# Altium PCB S52多功能板.PcbDoc (part 3 of 5)
Units mm, origin at the board's own origin, x right, y up, seen from the top; angles counter-clockwise.
Board outline 152.4 x 101.6 mm, 2 copper layers (Top Layer, Bottom Layer); 136 components, 143 nets, 561 pads, 46 vias.
Unrouted connection lines stored in the file: 1.
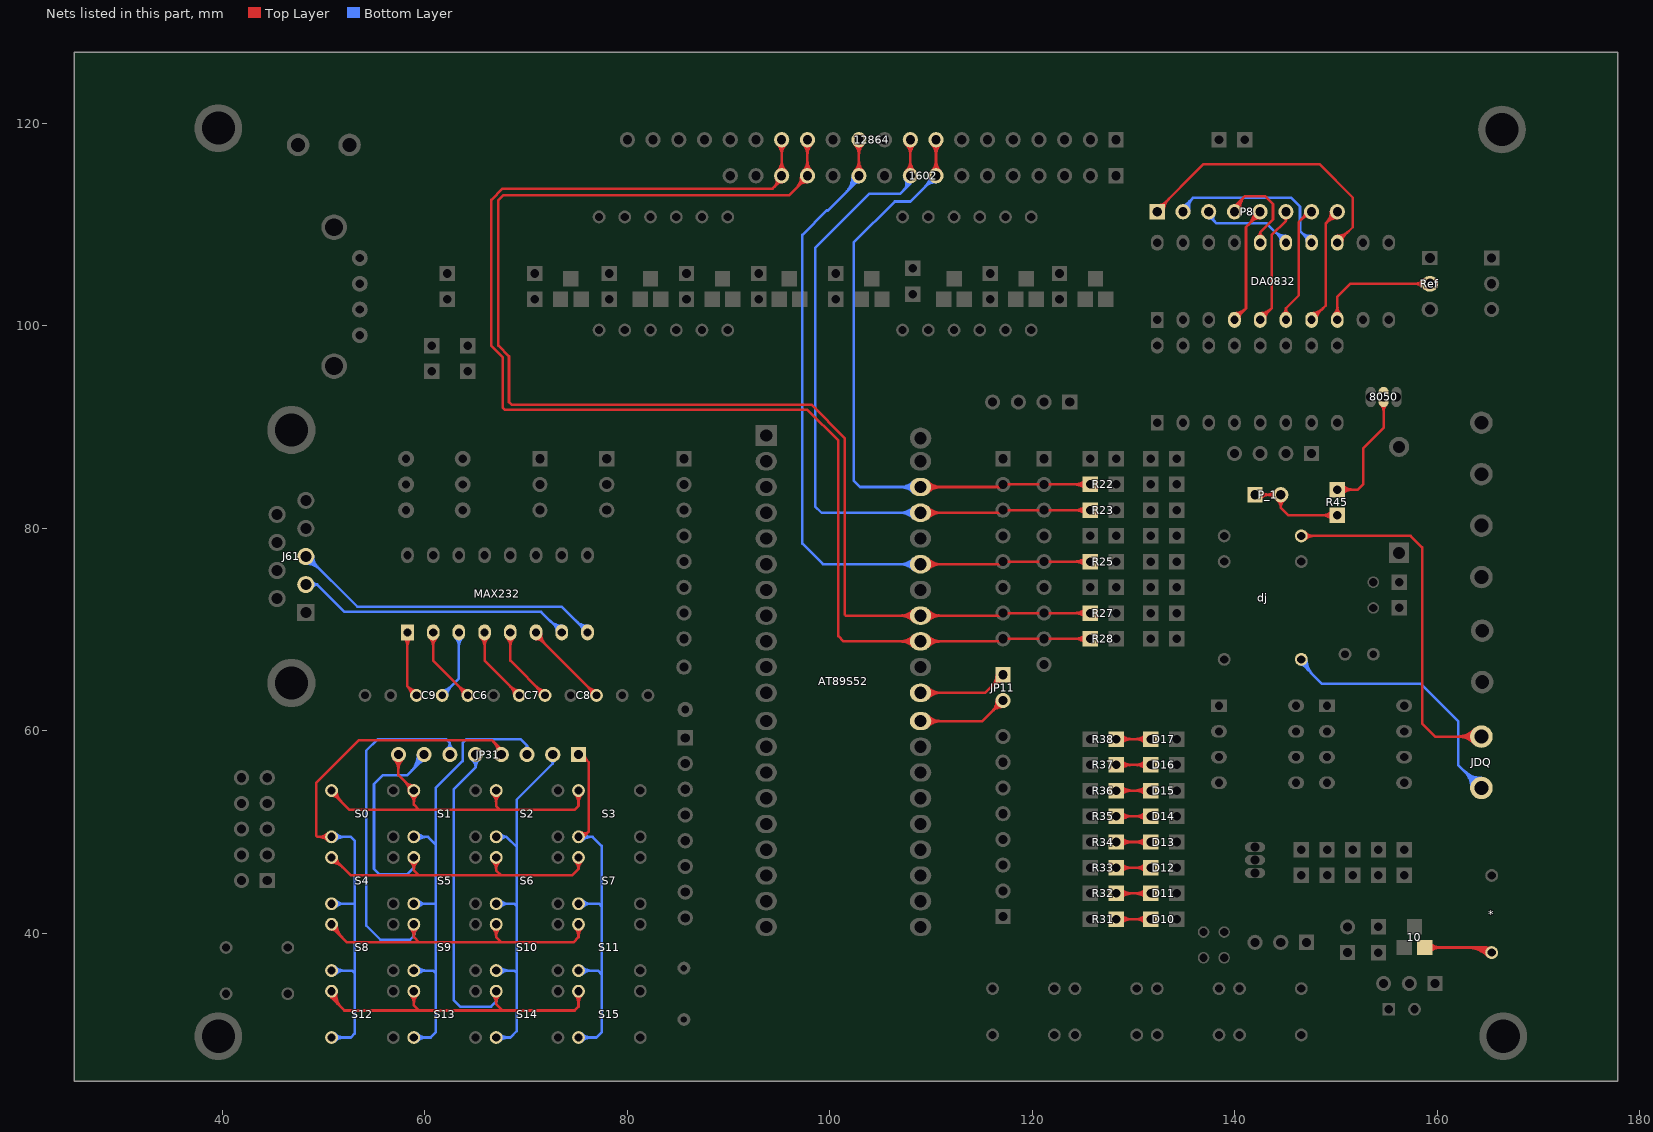
[diagram p3: the nets of this part, all layers, seen from the top]

## Via types
v1: diameter 1.27, hole 0.711, Top Layer to Bottom Layer, 46 vias

## Nets (pads, with @x,y where several pads share a name; then routed paths per layer and width w, separated by ;. In a path a pad name is that pad's centre, name@x,y a point inside that pad or via, vN(x,y) a via of type N, cw(c..) or ccw(c..) an arc to the next point about the centre after c; other vN are vias at no path point) (continued)
Net*_1: 10.E *.1 | length 17.7
  Top Layer w0.254: 10.E@158.75,38.608 164.846,38.608 ; 10.E@159.019,38.339 cw(c159.67,37.688) 159.67,38.608 cw(c159.67,39.528) 10.E@159.019,38.877 ; 10.E@159.199,38.159 cw(c160.283,37.075) 160.283,38.608 cw(c160.283,40.141) 10.E@159.199,39.057 ; 162.901,38.608 cw(c162.901,35.647) *.1@164.995,37.741 ; 163.514,38.608 cw(c163.514,36.26) *.1@165.174,37.92 ; 164.128,38.608 cw(c164.128,36.874) *.1@165.354,38.1 164.846,38.608 ; 164.741,38.608 cw(c164.741,37.487) *.1@165.534,38.28 ; *.1@164.896,38.319 ccw(c164.666,38.428) 164.846,38.608 ; *.1@165.135,38.558 cw(c165.026,38.788) 164.846,38.608
NetAT89S52_29: AT89S52.29 JP11.2 | length 17.6
  Top Layer w0.254: AT89S52.29@108.966,60.96 115.062,60.96 JP11.2@117.094,62.992 ; AT89S52.29@109.485,60.591 cw(c110.375,59.701) 110.375,60.96 cw(c110.375,62.219) AT89S52.29@109.485,61.329 ; AT89S52.29@109.664,60.412 cw(c110.988,59.088) 110.988,60.96 cw(c110.988,62.832) AT89S52.29@109.664,61.508 ; JP11.2@116.471,62.992 cw(c114.967,62.992) 116.03,61.928 cw(c117.094,60.865) JP11.2@117.094,62.369 ; JP11.2@116.725,62.992 cw(c115.834,62.992) 116.464,62.362 cw(c117.094,61.732) JP11.2@117.094,62.623
NetAT89S52_30: AT89S52.30 JP11.1 | length 17.5
  Top Layer w0.254: AT89S52.30@108.962,63.753 115.315,63.753 JP11.1@117.094,65.532 ; AT89S52.30@109.481,63.384 cw(c110.371,62.494) 110.371,63.753 cw(c110.371,65.012) AT89S52.30@109.481,64.122 ; AT89S52.30@109.66,63.205 cw(c110.984,61.881) 110.984,63.753 cw(c110.984,65.625) AT89S52.30@109.66,64.301 ; JP11.1@116.471,65.532 cw(c114.967,65.532) 116.03,64.468 cw(c117.094,63.405) JP11.1@117.094,64.909 ; JP11.1@116.725,65.532 cw(c115.834,65.532) 116.464,64.902 cw(c117.094,64.272) JP11.1@117.094,65.163
NetC6_1: C6.1 MAX232.2 | length 11.5
  Top Layer w0.254: MAX232.2@60.482,69.205 cw(c59.632,68.355) 60.834,68.355 cw(c62.036,68.355) MAX232.2@61.186,69.205 ; MAX232.2@60.834,69.719 60.834,66.928 C6.1@64.262,63.5 ; C6.1@63.754,63.5 ccw(c62.528,63.5) 63.395,64.367 ccw(c64.262,65.234) C6.1@64.262,64.008
NetC7_1: C7.1 MAX232.4 | length 11.5
  Top Layer w0.254: MAX232.4@65.562,69.205 cw(c64.712,68.355) 65.914,68.355 cw(c67.116,68.355) MAX232.4@66.266,69.205 ; MAX232.4@65.914,69.719 65.914,66.928 C7.1@69.342,63.5 ; C7.1@68.834,63.5 ccw(c67.608,63.5) 68.475,64.367 ccw(c69.342,65.234) C7.1@69.342,64.008
NetC7_2: C7.2 MAX232.5 | length 11.5
  Top Layer w0.254: MAX232.5@68.102,69.205 cw(c67.252,68.355) 68.454,68.355 cw(c69.656,68.355) MAX232.5@68.806,69.205 ; MAX232.5@68.454,69.719 68.454,66.928 C7.2@71.882,63.5 ; C7.2@71.374,63.5 ccw(c70.148,63.5) 71.015,64.367 ccw(c71.882,65.234) C7.2@71.882,64.008
NetC8_2: C8.2 MAX232.6 | length 13.1
  Top Layer w0.254: MAX232.6@70.994,69.059 cw(c70.994,68.071) 71.693,68.769 ; MAX232.6@70.994,69.719 70.994,69.468 C8.2@76.962,63.5 ; MAX232.6@71.238,69.557 ccw(c72.041,69.557) 71.473,68.989 ; MAX232.6@71.492,69.557 ccw(c72.909,69.557) 71.907,68.555 ; C8.2@76.454,63.5 ccw(c75.228,63.5) 76.095,64.367 ccw(c76.962,65.234) C8.2@76.962,64.008
NetC9_1: C9.1 MAX232.1 | length 10.4
  Top Layer w0.254: MAX232.1@57.942,69.205 cw(c57.092,68.355) 58.294,68.355 cw(c59.496,68.355) MAX232.1@58.646,69.205 ; MAX232.1@58.294,69.719 58.294,64.388 C9.1@59.182,63.5 ; C9.1@58.674,63.5 ccw(c57.448,63.5) 58.315,64.367 ccw(c59.182,65.234) C9.1@59.182,64.008
NetC9_2: C9.2 MAX232.3 | length 10.7
  Bottom Layer w0.254: C9.2@61.722,63.5 63.374,65.152 MAX232.3@63.374,69.719 ; C9.2@61.722,64.008 ccw(c61.722,65.234) 62.589,64.367 ccw(c63.456,63.5) C9.2@62.23,63.5 ; MAX232.3@63.022,69.205 cw(c62.172,68.355) 63.374,68.355 cw(c64.576,68.355) MAX232.3@63.726,69.205
NetD10_2: D10.2 R31.2 | length 11.3
  Top Layer w0.254: R31.2@128.27,41.402 D10.2@131.699,41.402 D10.2@131.572,41.275 ; R31.2@128.539,41.133 cw(c129.19,40.482) 129.19,41.402 cw(c129.19,42.322) R31.2@128.539,41.671 ; R31.2@128.719,40.953 cw(c129.803,39.869) 129.803,41.402 cw(c129.803,42.935) R31.2@128.719,41.851 ; D10.2@131.25,40.953 ccw(c130.166,39.869) 130.166,41.402 ccw(c130.166,42.935) D10.2@131.25,41.851 ; D10.2@131.43,41.133 ccw(c130.779,40.482) 130.779,41.402 ccw(c130.779,42.322) D10.2@131.43,41.671
NetD11_2: D11.2 R32.2 | length 11.3
  Top Layer w0.254: R32.2@128.27,43.942 D11.2@131.699,43.942 D11.2@131.572,43.815 ; R32.2@128.539,43.673 cw(c129.19,43.022) 129.19,43.942 cw(c129.19,44.862) R32.2@128.539,44.211 ; R32.2@128.719,43.493 cw(c129.803,42.409) 129.803,43.942 cw(c129.803,45.475) R32.2@128.719,44.391 ; D11.2@131.25,43.493 ccw(c130.166,42.409) 130.166,43.942 ccw(c130.166,45.475) D11.2@131.25,44.391 ; D11.2@131.43,43.673 ccw(c130.779,43.022) 130.779,43.942 ccw(c130.779,44.862) D11.2@131.43,44.211
NetD12_2: D12.2 R33.2 | length 11.3
  Top Layer w0.254: R33.2@128.27,46.482 D12.2@131.699,46.482 D12.2@131.572,46.355 ; R33.2@128.539,46.213 cw(c129.19,45.562) 129.19,46.482 cw(c129.19,47.402) R33.2@128.539,46.751 ; R33.2@128.719,46.033 cw(c129.803,44.949) 129.803,46.482 cw(c129.803,48.015) R33.2@128.719,46.931 ; D12.2@131.25,46.033 ccw(c130.166,44.949) 130.166,46.482 ccw(c130.166,48.015) D12.2@131.25,46.931 ; D12.2@131.43,46.213 ccw(c130.779,45.562) 130.779,46.482 ccw(c130.779,47.402) D12.2@131.43,46.751
NetD13_2: D13.2 R34.2 | length 11.3
  Top Layer w0.254: R34.2@128.27,49.022 D13.2@131.699,49.022 D13.2@131.572,48.895 ; R34.2@128.539,48.753 cw(c129.19,48.102) 129.19,49.022 cw(c129.19,49.942) R34.2@128.539,49.291 ; R34.2@128.719,48.573 cw(c129.803,47.489) 129.803,49.022 cw(c129.803,50.555) R34.2@128.719,49.471 ; D13.2@131.25,48.573 ccw(c130.166,47.489) 130.166,49.022 ccw(c130.166,50.555) D13.2@131.25,49.471 ; D13.2@131.43,48.753 ccw(c130.779,48.102) 130.779,49.022 ccw(c130.779,49.942) D13.2@131.43,49.291
NetD14_2: D14.2 R35.2 | length 11.1
  Top Layer w0.254: R35.2@128.27,51.562 D14.2@131.699,51.562 ; R35.2@128.539,51.293 cw(c129.19,50.642) 129.19,51.562 cw(c129.19,52.482) R35.2@128.539,51.831 ; R35.2@128.719,51.113 cw(c129.803,50.029) 129.803,51.562 cw(c129.803,53.095) R35.2@128.719,52.011 ; D14.2@131.25,51.113 ccw(c130.166,50.029) 130.166,51.562 ccw(c130.166,53.095) D14.2@131.25,52.011 ; D14.2@131.43,51.293 ccw(c130.779,50.642) 130.779,51.562 ccw(c130.779,52.482) D14.2@131.43,51.831
NetD15_2: D15.2 R36.2 | length 11.3
  Top Layer w0.254: R36.2@128.27,54.102 D15.2@131.699,54.102 D15.2@131.572,53.975 ; R36.2@128.539,53.833 cw(c129.19,53.182) 129.19,54.102 cw(c129.19,55.022) R36.2@128.539,54.371 ; R36.2@128.719,53.653 cw(c129.803,52.569) 129.803,54.102 cw(c129.803,55.635) R36.2@128.719,54.551 ; D15.2@131.25,53.653 ccw(c130.166,52.569) 130.166,54.102 ccw(c130.166,55.635) D15.2@131.25,54.551 ; D15.2@131.43,53.833 ccw(c130.779,53.182) 130.779,54.102 ccw(c130.779,55.022) D15.2@131.43,54.371
NetD16_2: D16.2 R37.2 | length 11.1
  Top Layer w0.254: R37.2@128.27,56.642 D16.2@131.699,56.642 ; R37.2@128.539,56.373 cw(c129.19,55.722) 129.19,56.642 cw(c129.19,57.562) R37.2@128.539,56.911 ; R37.2@128.719,56.193 cw(c129.803,55.109) 129.803,56.642 cw(c129.803,58.175) R37.2@128.719,57.091 ; D16.2@131.25,56.193 ccw(c130.166,55.109) 130.166,56.642 ccw(c130.166,58.175) D16.2@131.25,57.091 ; D16.2@131.43,56.373 ccw(c130.779,55.722) 130.779,56.642 ccw(c130.779,57.562) D16.2@131.43,56.911
NetD17_2: D17.2 R38.2 | length 11.3
  Top Layer w0.254: R38.2@128.27,59.182 D17.2@131.699,59.182 D17.2@131.572,59.055 ; R38.2@128.539,58.913 cw(c129.19,58.262) 129.19,59.182 cw(c129.19,60.102) R38.2@128.539,59.451 ; R38.2@128.719,58.733 cw(c129.803,57.649) 129.803,59.182 cw(c129.803,60.715) R38.2@128.719,59.631 ; D17.2@131.25,58.733 ccw(c130.166,57.649) 130.166,59.182 ccw(c130.166,60.715) D17.2@131.25,59.631 ; D17.2@131.43,58.913 ccw(c130.779,58.262) 130.779,59.182 ccw(c130.779,60.102) D17.2@131.43,59.451
NetDA0832_4: DA0832.4 P8.5 | length 17.7
  Top Layer w0.254: DA0832.4@139.955,100.58 141.097,101.722 141.097,109.728 142.494,111.125 P8.5@142.494,111.252 ; DA0832.4@139.955,100.987 ccw(c139.955,101.968) 140.649,101.274 ; DA0832.4@139.955,101.241 ccw(c139.955,102.835) 141.082,101.708 ; DA0832.4@140.453,100.743 cw(c141.263,100.743) 140.69,101.316 ; 141.341,109.972 ccw(c140.06,111.252) P8.5@141.871,111.252 ; 141.647,110.278 cw(c142.494,109.432) P8.5@142.494,110.629 ; 141.774,110.405 ccw(c140.928,111.252) P8.5@142.125,111.252
NetDA0832_5: DA0832.5 P8.6 | length 15.4
  Top Layer w0.254: DA0832.5@142.495,100.58 143.637,101.722 143.637,108.966 145.034,110.363 ; DA0832.5@142.495,100.987 ccw(c142.495,101.968) 143.189,101.274 ; DA0832.5@142.495,101.241 ccw(c142.495,102.835) 143.622,101.708 ; DA0832.5@142.993,100.743 cw(c143.803,100.743) 143.23,101.316 ; P8.6@144.78,111.252 P8.6@145.034,111.252 145.034,110.363 ; P8.6@144.821,110.666 cw(c144.711,110.363) 145.034,110.363 ; P8.6@145.247,110.666 ccw(c145.357,110.363) 145.034,110.363
NetDA0832_6: DA0832.6 P8.7 | length 15
  Top Layer w0.254: DA0832.6@144.74,101.144 ccw(c144.309,101.728) 145.035,101.728 ; DA0832.6@145.035,100.58 145.035,101.728 ; DA0832.6@145.33,101.144 cw(c145.761,101.728) 145.035,101.728 ; 146.579,110.511 cw(c147.483,109.607) P8.7@147.554,110.884 ; 146.69,110.622 ccw(c146.06,111.252) P8.7@146.951,111.252 ; P8.7@147.574,111.252 147.32,111.252 146.304,110.236 146.304,102.997 145.035,101.728
NetDA0832_7: DA0832.7 P8.8 | length 18.1
  Top Layer w0.254: DA0832.7@147.575,100.58 148.971,101.976 148.971,110.109 P8.8@150.114,111.252 ; DA0832.7@147.575,100.987 ccw(c147.575,101.968) 148.269,101.274 ; DA0832.7@147.575,101.241 ccw(c147.575,102.835) 148.702,101.708 ; DA0832.7@148.073,100.743 cw(c148.883,100.743) 148.31,101.316 ; P8.8@149.491,111.252 cw(c147.987,111.252) 149.05,110.188 cw(c150.114,109.125) P8.8@150.114,110.629 ; P8.8@149.745,111.252 cw(c148.854,111.252) 149.484,110.622 cw(c150.114,109.992) P8.8@150.114,110.883
NetDA0832_8: DA0832.8 Ref.3 | length 17.7
  Top Layer w0.254: DA0832.8@149.763,101.095 ccw(c148.913,101.945) 150.115,101.945 ccw(c151.317,101.945) DA0832.8@150.467,101.095 ; DA0832.8@150.115,100.58 150.115,102.871 151.384,104.14 Ref.3@159.258,104.14 ; Ref.3@158.745,103.691 ccw(c157.661,102.607) 157.661,104.14 ccw(c157.661,105.673) Ref.3@158.745,104.589 ; Ref.3@158.925,103.871 ccw(c158.275,103.22) 158.275,104.14 ccw(c158.275,105.06) Ref.3@158.925,104.409
NetDA0832_13: DA0832.13 P8.1 | length 33.7
  Top Layer w0.254: P8.1@132.334,111.252 132.334,111.379 136.906,115.951 148.336,115.951 151.638,112.649 151.638,109.723 DA0832.13@150.115,108.2 DA0832.13@150.114,108.201 ; P8.1@132.334,111.875 ccw(c132.334,113.072) 133.181,112.226 ; P8.1@132.703,111.252 cw(c133.9,111.252) 133.054,112.099 ; P8.1@132.957,111.252 cw(c134.768,111.252) 133.487,112.532 ; DA0832.13@150.115,108.607 ccw(c150.115,109.588) 150.809,108.894 ; DA0832.13@150.115,108.861 ccw(c150.115,110.455) 151.242,109.328 ; DA0832.13@150.613,108.363 cw(c151.423,108.363) 150.85,108.936
NetDA0832_14: DA0832.14 P8.2 | length 22.9
  Top Layer w0.254: DA0832.14@147.574,108.201 DA0832.14@147.575,108.2
  Bottom Layer w0.254: P8.2@134.874,111.252 134.874,111.633 135.89,112.649 ; P8.2@134.874,111.875 ccw(c134.874,112.459) 135.287,112.046 ; P8.2@134.987,111.272 cw(c135.755,111.411) 135.203,111.962 ; P8.2@135.237,111.317 cw(c136.336,111.516) 135.547,112.306 ; P8.2@135.487,111.363 cw(c136.918,111.621) 135.89,112.649 ; 146.512,109.263 ccw(c147.488,110.239) DA0832.14@147.552,108.86 ; 146.84,108.935 cw(c146.267,108.363) DA0832.14@147.077,108.363 ; 146.919,108.856 ccw(c147.524,109.461) DA0832.14@147.564,108.606 ; DA0832.14@147.575,108.2 146.431,109.344 146.431,111.76 145.542,112.649 135.89,112.649
NetDA0832_15: DA0832.15 P8.3 | length 13.6
  Top Layer w0.254: DA0832.15@145.034,108.201 DA0832.15@145.158,108.077
  Bottom Layer w0.254: P8.3@137.414,110.629 cw(c137.414,110.045) 137.827,110.458 ; P8.3@137.414,111.252 137.414,110.871 138.176,110.109 143.126,110.109 DA0832.15@145.035,108.2 ; P8.3@137.719,111.044 ccw(c138.063,110.81) 137.769,110.516 ; P8.3@137.929,110.901 ccw(c138.321,110.635) 137.985,110.3 ; 143.908,109.328 ccw(c145.035,110.455) DA0832.15@145.035,108.861 ; 144.3,108.935 cw(c143.727,108.363) DA0832.15@144.537,108.363 ; 144.341,108.894 ccw(c145.035,109.588) DA0832.15@145.035,108.607
NetDA0832_16: DA0832.16 P8.4 | length 14.1
  Top Layer w0.254: P8.4@139.954,111.252 139.954,111.76 140.97,112.776 ; P8.4@140.066,111.277 cw(c140.96,111.472) 140.313,112.119 ; P8.4@140.314,111.331 cw(c141.499,111.59) 140.642,112.448 ; P8.4@140.563,111.385 cw(c142.038,111.708) 140.97,112.776 ; DA0832.16@142.248,108.795 ccw(c142.004,109.221) 142.495,109.221 ; DA0832.16@142.494,108.201 DA0832.16@142.495,108.2 142.495,109.221 ; DA0832.16@142.742,108.795 cw(c142.986,109.221) 142.495,109.221 ; 140.97,112.776 143.002,112.776 143.764,112.014 143.764,110.49 142.495,109.221
Netdj_2: dj.2 JDQ.1 | length 46.4
  Top Layer w0.254: dj.2@146.558,79.248 157.353,79.248 158.496,78.105 158.496,60.706 159.766,59.436 JDQ.1@164.338,59.436 ; dj.2@146.917,78.889 cw(c147.784,78.022) 147.784,79.248 cw(c147.784,80.474) dj.2@146.917,79.607 ; JDQ.1@163.642,58.74 ccw(c161.96,57.058) 161.96,59.436 ccw(c161.96,61.814) JDQ.1@163.642,60.132 ; JDQ.1@163.821,58.919 ccw(c162.573,57.671) 162.573,59.436 ccw(c162.573,61.201) JDQ.1@163.821,59.953 ; JDQ.1@164.001,59.099 ccw(c163.186,58.284) 163.186,59.436 ccw(c163.186,60.588) JDQ.1@164.001,59.773
Netdj_4: dj.4 JDQ.2 | length 38
  Bottom Layer w0.254: dj.4@146.558,66.548 cw(c146.558,66.241) 146.775,66.458 ; dj.4@146.812,67.056 ccw(c148.345,67.056) 147.261,65.972 ; 146.827,66.406 cw(c147.478,67.056) dj.4@146.558,67.056 146.558,66.675 148.59,64.643 158.369,64.643 162.052,60.96 162.052,56.642 JDQ.2@164.338,54.356 ; dj.4@147.066,67.056 ccw(c149.212,67.056) 147.695,65.538 ; JDQ.2@163.353,54.356 ccw(c160.975,54.356) 162.657,56.037 ccw(c164.338,57.719) JDQ.2@164.338,55.341 ; JDQ.2@163.607,54.356 ccw(c161.842,54.356) 163.09,55.604 ccw(c164.338,56.852) JDQ.2@164.338,55.087 ; JDQ.2@163.861,54.356 ccw(c162.709,54.356) 163.524,55.17 ccw(c164.338,55.985) JDQ.2@164.338,54.833
NetJ61_2: J61.2 MAX232.7 | length 31.1
  Bottom Layer w0.254: J61.2@48.258,74.446 49.379,74.446 ; J61.2@48.91,74.146 cw(c49.379,73.93) 49.379,74.446 ; J61.2@48.91,74.746 ccw(c49.379,74.962) 49.379,74.446 ; 72.407,70.847 ccw(c73.534,71.974) MAX232.7@73.534,70.38 ; 72.799,70.455 cw(c72.226,69.882) MAX232.7@73.036,69.882 ; 72.84,70.413 ccw(c73.534,71.107) MAX232.7@73.534,70.126 ; MAX232.7@73.534,69.719 71.498,71.755 52.07,71.755 49.379,74.446
NetJ61_3: J61.3 MAX232.8 | length 38.1
  Bottom Layer w0.254: J61.3@48.258,76.498 cw(c48.258,74.453) 49.704,75.899 ; J61.3@48.258,76.752 cw(c48.258,75.32) 49.27,76.333 ; J61.3@48.258,77.216 48.387,77.216 53.34,72.263 73.53,72.263 MAX232.8@76.074,69.719 ; J61.3@48.722,77.216 ccw(c49.531,77.216) 48.959,76.644 ; J61.3@48.976,77.216 ccw(c50.398,77.216) 49.393,76.21 ; 74.947,70.847 ccw(c76.074,71.974) MAX232.8@76.074,70.38 ; 75.339,70.455 cw(c74.766,69.882) MAX232.8@75.576,69.882 ; 75.38,70.413 ccw(c76.074,71.107) MAX232.8@76.074,70.126
NetJP7_18: 
NetJP31_1: JP31.1 S3.2 S7.2 S11.2 S15.2 | length 48.5
  Top Layer w0.254: S3.2@75.184,49.53 75.692,49.53 76.2,50.038 ; JP31.1@75.184,57.658 75.438,57.658 76.2,56.896 76.2,50.038 ; JP31.1@75.269,57.299 cw(c75.451,56.536) 76.005,57.091 ; S3.2@75.321,49.744 ccw(c75.605,50.187) 75.977,49.815 ; S3.2@75.458,49.958 ccw(c75.779,50.459) 76.2,50.038 ; JP31.1@75.807,57.658 ccw(c76.698,57.658) 76.068,57.028
  Bottom Layer w0.254: S15.2@75.184,29.718 76.962,29.718 77.47,30.226 77.47,48.641 76.581,49.53 S3.2@75.184,49.53 ; S11.2@75.184,36.322 77.089,36.322 77.47,35.941 ; S7.2@75.184,42.926 77.216,42.926 77.47,42.672 ; S15.2@75.543,29.359 cw(c76.41,28.492) 76.41,29.718 cw(c76.41,30.944) S15.2@75.543,30.077 ; S11.2@75.543,35.963 cw(c76.41,35.096) 76.41,36.322 cw(c76.41,37.548) S11.2@75.543,36.681 ; S7.2@75.543,42.567 cw(c76.41,41.7) 76.41,42.926 cw(c76.41,44.152) S7.2@75.543,43.285 ; S3.2@75.543,49.171 cw(c76.41,48.304) 76.41,49.53 cw(c76.41,50.756) S3.2@75.543,49.889
NetJP31_2: JP31.2 S2.2 S6.2 S10.2 S14.2 | length 45.8
  Bottom Layer w0.254: S14.2@67.056,29.718 68.453,29.718 69.088,30.353 69.088,53.213 72.644,56.769 ; S10.2@67.056,36.322 68.834,36.322 69.088,36.068 ; S6.2@67.056,42.926 68.834,42.926 69.088,42.672 ; S2.2@67.056,49.53 68.072,49.53 ; S14.2@67.415,29.359 cw(c68.282,28.492) 68.282,29.718 cw(c68.282,30.944) S14.2@67.415,30.077 ; S10.2@67.415,35.963 cw(c68.282,35.096) 68.282,36.322 cw(c68.282,37.548) S10.2@67.415,36.681 ; S6.2@67.415,42.567 cw(c68.282,41.7) 68.282,42.926 cw(c68.282,44.152) S6.2@67.415,43.285 ; S2.2@67.462,49.225 cw(c68.072,48.768) 68.072,49.53 ; S2.2@67.462,49.835 ccw(c68.072,50.292) 68.072,49.53 ; 69.088,48.514 68.072,49.53 ; JP31.2@72.431,57.072 cw(c72.321,56.769) 72.644,56.769 ; JP31.2@72.644,57.658 72.644,56.769 ; JP31.2@72.857,57.072 ccw(c72.967,56.769) 72.644,56.769
NetJP31_3: JP31.3 S1.2 S5.2 S9.2 S13.2 | length 55
  Bottom Layer w0.254: S13.2@58.928,29.718 60.579,29.718 61.087,30.226 61.087,54.356 63.754,57.023 63.754,58.801 64.135,59.182 69.469,59.182 70.104,58.547 ; S9.2@58.928,36.322 60.833,36.322 61.087,36.068 ; S5.2@58.928,42.926 60.96,42.926 ; S1.2@58.928,49.53 60.325,49.53 61.087,48.768 ; S13.2@59.287,29.359 cw(c60.154,28.492) 60.154,29.718 cw(c60.154,30.944) S13.2@59.287,30.077 ; S9.2@59.287,35.963 cw(c60.154,35.096) 60.154,36.322 cw(c60.154,37.548) S9.2@59.287,36.681 ; S5.2@59.287,42.567 cw(c60.154,41.7) 60.154,42.926 cw(c60.154,44.152) S5.2@59.287,43.285 ; S1.2@59.287,49.171 cw(c60.154,48.304) 60.154,49.53 cw(c60.154,50.756) S1.2@59.287,49.889 ; JP31.3@69.891,58.244 ccw(c69.781,58.547) 70.104,58.547 ; JP31.3@70.104,57.658 70.104,58.547 ; JP31.3@70.317,58.244 cw(c70.427,58.547) 70.104,58.547
NetJP31_4: JP31.4 S0.2 S4.2 S8.2 S12.2 | length 68.2
  Top Layer w0.254: S0.2@50.441,49.171 ccw(c49.574,48.304) 49.574,49.53 ccw(c49.574,50.756) S0.2@50.441,49.889 ; S0.2@50.8,49.53 49.403,49.53 49.276,49.657 49.276,54.864 53.467,59.055 66.675,59.055 67.564,58.166 JP31.4@67.564,57.658 ; 66.782,58.948 cw(c65.744,57.91) JP31.4@67.198,57.709 ; 67.144,58.586 cw(c66.379,57.822) JP31.4@67.45,57.674
  Bottom Layer w0.254: S12.2@50.8,29.718 52.705,29.718 53.086,30.099 53.086,49.149 52.705,49.53 S0.2@50.8,49.53 ; S8.2@50.8,36.322 52.832,36.322 53.086,36.068 ; S4.2@50.8,42.926 52.959,42.926 ; S12.2@51.159,29.359 cw(c52.026,28.492) 52.026,29.718 cw(c52.026,30.944) S12.2@51.159,30.077 ; S8.2@51.159,35.963 cw(c52.026,35.096) 52.026,36.322 cw(c52.026,37.548) S8.2@51.159,36.681 ; S4.2@51.159,42.567 cw(c52.026,41.7) 52.026,42.926 cw(c52.026,44.152) S4.2@51.159,43.285 ; S0.2@51.159,49.171 cw(c52.026,48.304) 52.026,49.53 cw(c52.026,50.756) S0.2@51.159,49.889
NetJP31_5: JP31.5 S12.1 S13.1 S14.1 S15.1 | length 76.6
  Top Layer w0.254: S12.1@51.049,34.241 ccw(c52.36,33.984) 51.415,33.04 ; 51.078,33.377 cw(c51.796,34.095) S12.1@50.8,34.29 50.8,33.655 52.07,32.385 74.803,32.385 75.184,32.766 S15.1@75.184,34.29 ; S12.1@51.298,34.192 ccw(c52.923,33.873) 51.752,32.703 ; S13.1@58.569,33.931 cw(c57.702,33.064) 58.928,33.064 cw(c60.154,33.064) S13.1@59.287,33.931 ; S13.1@58.928,34.29 58.928,32.893 59.436,32.385 ; S14.1@66.697,33.931 cw(c65.83,33.064) 67.056,33.064 cw(c68.282,33.064) S14.1@67.415,33.931 ; S14.1@67.056,34.29 67.056,33.02 67.691,32.385 ; S15.1@74.825,33.931 cw(c73.958,33.064) 75.184,33.064 cw(c76.41,33.064) S15.1@75.543,33.931
  Bottom Layer w0.254: JP31.5@64.643,57.165 cw(c64.041,56.388) 65.024,56.388 ; JP31.5@64.77,57.658 JP31.5@65.024,57.658 65.024,56.388 ; JP31.5@64.798,57.366 cw(c64.442,56.906) 65.024,56.906 cw(c65.606,56.906) JP31.5@65.25,57.366 ; JP31.5@65.405,57.165 ccw(c66.007,56.388) 65.024,56.388 ; S14.1@66.751,33.884 cw(c66.294,33.274) 67.056,33.274 ; S14.1@67.056,34.29 67.056,33.274 ; S14.1@67.361,33.884 ccw(c67.818,33.274) 67.056,33.274 ; 65.024,56.388 62.865,54.229 62.865,33.401 63.5,32.766 66.548,32.766 67.056,33.274
NetJP31_6: JP31.6 S8.1 S9.1 S10.1 S11.1 | length 76.6
  Top Layer w0.254: S8.1@50.8,40.386 cw(c50.8,39.773) 51.234,40.206 ; S8.1@50.8,40.894 50.8,40.64 52.324,39.116 74.676,39.116 75.184,39.624 S11.1@75.184,40.894 ; S8.1@51.054,40.894 ccw(c52.28,40.894) 51.413,40.027 ; S8.1@51.308,40.894 ccw(c53.148,40.894) 51.847,39.593 ; S9.1@58.569,40.535 cw(c57.702,39.668) 58.928,39.668 cw(c60.154,39.668) S9.1@59.287,40.535 ; S9.1@58.928,40.894 58.928,39.624 59.436,39.116 ; S10.1@66.697,40.535 cw(c65.83,39.668) 67.056,39.668 cw(c68.282,39.668) S10.1@67.415,40.535 ; S10.1@67.056,40.894 67.056,39.624 67.564,39.116 ; S11.1@74.825,40.535 cw(c73.958,39.668) 75.184,39.668 cw(c76.41,39.668) S11.1@75.543,40.535
  Bottom Layer w0.254: S9.1@58.588,40.517 cw(c57.896,39.751) 58.928,39.751 ; S9.1@58.928,40.894 58.928,39.751 ; S9.1@59.268,40.517 ccw(c59.96,39.751) 58.928,39.751 ; JP31.6@62.146,58.182 ccw(c61.747,58.801) 62.484,58.801 ; JP31.6@62.357,57.658 JP31.6@62.484,57.658 62.484,58.801 ; JP31.6@62.822,58.182 cw(c63.221,58.801) 62.484,58.801 ; 58.928,39.751 58.547,39.37 55.626,39.37 54.229,40.767 54.229,58.039 55.372,59.182 62.103,59.182 62.484,58.801
NetJP31_7: JP31.7 S4.1 S5.1 S6.1 S7.1 | length 65.1
  Top Layer w0.254: S4.1@50.8,46.99 cw(c50.8,45.457) 51.884,46.541 ; S4.1@50.8,47.244 cw(c50.8,46.324) 51.45,46.975 ; S4.1@50.8,47.498 50.927,47.498 52.705,45.72 74.549,45.72 75.184,46.355 ; S4.1@51.308,47.498 ccw(c52.228,47.498) 51.577,46.848 ; S5.1@58.569,47.139 cw(c57.702,46.272) 58.928,46.272 cw(c60.154,46.272) S5.1@59.287,47.139 ; S5.1@58.928,47.498 58.928,46.228 59.436,45.72 ; S6.1@66.697,47.139 cw(c65.83,46.272) 67.056,46.272 cw(c68.282,46.272) S6.1@67.415,47.139 ; S6.1@67.056,47.498 67.056,46.228 67.564,45.72 ; S7.1@74.844,47.121 cw(c74.152,46.355) 75.184,46.355 ; S7.1@75.184,47.498 75.184,46.355 ; S7.1@75.524,47.121 ccw(c76.216,46.355) 75.184,46.355
  Bottom Layer w0.254: 58.611,55.944 ccw(c56.897,57.658) JP31.7@59.321,57.658 ; S5.1@58.623,47.092 cw(c58.166,46.482) 58.928,46.482 ; S5.1@58.928,47.498 58.928,46.482 ; 59.045,56.378 ccw(c57.764,57.658) JP31.7@59.575,57.658 ; S5.1@59.233,47.092 ccw(c59.69,46.482) 58.928,46.482 ; 59.478,56.811 ccw(c58.632,57.658) JP31.7@59.829,57.658 ; 59.531,56.864 cw(c59.944,56.451) JP31.7@59.944,57.035 ; JP31.7@59.944,57.658 59.944,57.277 58.293,55.626 55.88,55.626 54.991,54.737 54.991,46.355 55.499,45.847 58.293,45.847 58.928,46.482
NetJP31_8: JP31.8 S0.1 S1.1 S2.1 S3.1 | length 49.4
  Top Layer w0.254: S0.1@50.8,53.594 cw(c50.8,52.674) 51.45,53.325 ; S0.1@50.8,54.102 50.8,53.975 52.578,52.197 74.803,52.197 75.184,52.578 S3.1@75.184,54.102 ; S0.1@51.054,54.102 ccw(c51.974,54.102) 51.323,53.452 ; S0.1@51.308,54.102 ccw(c52.841,54.102) 51.757,53.018 ; JP31.8@56.963,57.217 cw(c55.9,56.154) 57.404,56.154 cw(c58.908,56.154) JP31.8@57.845,57.217 ; JP31.8@57.143,57.397 cw(c56.513,56.767) 57.404,56.767 cw(c58.295,56.767) JP31.8@57.665,57.397 ; JP31.8@57.404,57.658 57.404,55.626 S1.1@58.928,54.102 58.928,52.705 59.436,52.197 ; S1.1@58.42,54.102 ccw(c57.194,54.102) 58.061,54.969 ccw(c58.928,55.836) S1.1@58.928,54.61 ; S1.1@58.569,53.743 cw(c57.702,52.876) 58.928,52.876 cw(c60.154,52.876) S1.1@59.287,53.743 ; S2.1@66.697,53.743 cw(c65.83,52.876) 67.056,52.876 cw(c68.282,52.876) S2.1@67.415,53.743 ; S2.1@67.056,54.102 67.056,52.578 67.437,52.197 ; S3.1@74.825,53.743 cw(c73.958,52.876) 75.184,52.876 cw(c76.41,52.876) S3.1@75.543,53.743
NetP_1_2: P_1.1 P_1.2 R45.2 | length 23.9
  Top Layer w0.254: P_1.1@141.986,83.312 P_1.2@144.526,83.312 144.526,82.042 ; P_1.1@142.247,83.051 cw(c142.877,82.421) 142.877,83.312 cw(c142.877,84.203) P_1.1@142.247,83.573 ; P_1.1@142.427,82.871 cw(c143.49,81.808) 143.49,83.312 cw(c143.49,84.816) P_1.1@142.427,83.753 ; P_1.2@144.085,82.871 ccw(c143.022,81.808) 143.022,83.312 ccw(c143.022,84.816) P_1.2@144.085,83.753 ; P_1.2@144.145,82.819 cw(c143.543,82.042) 144.526,82.042 ; P_1.2@144.265,83.051 ccw(c143.635,82.421) 143.635,83.312 ccw(c143.635,84.203) P_1.2@144.265,83.573 ; P_1.2@144.3,83.02 cw(c143.944,82.56) 144.526,82.56 cw(c145.108,82.56) P_1.2@144.752,83.02 ; P_1.2@144.907,82.819 ccw(c145.509,82.042) 144.526,82.042 ; R45.2@149.665,80.831 ccw(c148.581,79.747) 148.581,81.28 ccw(c148.581,82.813) R45.2@149.665,81.729 ; R45.2@149.845,81.011 ccw(c149.194,80.36) 149.194,81.28 ccw(c149.194,82.2) R45.2@149.845,81.549 ; R45.2@150.114,81.28 145.288,81.28 144.526,82.042
NetQ7_2: 8050.2 R45.1 | length 17.5
  Top Layer w0.254: R45.1@150.114,83.82 152.146,83.82 152.655,84.329 152.655,87.88 154.686,89.911 8050.2@154.686,92.964 ; R45.1@150.383,83.551 cw(c151.034,82.9) 151.034,83.82 cw(c151.034,84.74) R45.1@150.383,84.089 ; R45.1@150.563,83.371 cw(c151.647,82.287) 151.647,83.82 cw(c151.647,85.353) R45.1@150.563,84.269 ; 8050.2@154.422,92.2 cw(c153.786,91.564) 154.686,91.564 cw(c155.586,91.564) 8050.2@154.95,92.2
P00: 1602.7 12864.7 AT89S52.39 JP-0.1 P0.1 R21.1 | length 100.9
  Top Layer w0.254: AT89S52.39@108.962,86.613 116.839,86.613 P0.1@117.094,86.868 R21.1@125.73,86.868 ; AT89S52.39@109.481,86.244 cw(c110.371,85.354) 110.371,86.613 cw(c110.371,87.872) AT89S52.39@109.481,86.982 ; AT89S52.39@109.66,86.065 cw(c110.984,84.741) 110.984,86.613 cw(c110.984,88.485) AT89S52.39@109.66,87.161 ; 1602.7@112.589,115.249 ccw(c111.526,116.312) 113.03,116.312 ccw(c114.534,116.312) 1602.7@113.471,115.249 ; 12864.7@112.589,117.923 cw(c111.526,116.86) 113.03,116.86 cw(c114.534,116.86) 12864.7@113.471,117.923 ; 1602.7@112.769,115.069 ccw(c112.139,115.699) 113.03,115.699 ccw(c113.921,115.699) 1602.7@113.291,115.069 ; 12864.7@112.769,118.103 cw(c112.139,117.473) 113.03,117.473 cw(c113.921,117.473) 12864.7@113.291,118.103 ; 1602.7@113.03,114.808 12864.7@113.03,118.364 ; 114.974,86.613 ccw(c114.974,88.988) P0.1@116.653,87.309 ; 115.587,86.613 ccw(c115.587,88.375) P0.1@116.833,87.129 ; 116.201,86.613 ccw(c116.201,87.761) P0.1@117.013,86.949 ; 116.206,86.613 cw(c116.206,85.98) P0.1@116.653,86.427 ; P0.1@117.355,86.607 cw(c117.985,85.977) 117.985,86.868 cw(c117.985,87.759) P0.1@117.355,87.129 ; P0.1@117.535,86.427 cw(c118.598,85.364) 118.598,86.868 cw(c118.598,88.372) P0.1@117.535,87.309 ; JP-0.1@120.717,86.427 ccw(c119.654,85.364) 119.654,86.868 ccw(c119.654,88.372) JP-0.1@120.717,87.309 ; JP-0.1@120.897,86.607 ccw(c120.267,85.977) 120.267,86.868 ccw(c120.267,87.759) JP-0.1@120.897,87.129 ; JP-0.1@121.419,86.607 cw(c122.049,85.977) 122.049,86.868 cw(c122.049,87.759) JP-0.1@121.419,87.129 ; JP-0.1@121.599,86.427 cw(c122.662,85.364) 122.662,86.868 cw(c122.662,88.372) JP-0.1@121.599,87.309 ; R21.1@125.281,86.419 ccw(c124.197,85.335) 124.197,86.868 ccw(c124.197,88.401) R21.1@125.281,87.317 ; R21.1@125.349,86.868 R21.1@125.603,86.614 ; R21.1@125.461,86.599 ccw(c124.81,85.948) 124.81,86.868 ccw(c124.81,87.788) R21.1@125.461,87.137
  Bottom Layer w0.254: AT89S52.39@108.264,86.065 ccw(c106.94,84.741) 106.94,86.613 ccw(c106.94,88.485) AT89S52.39@108.264,87.161 ; AT89S52.39@108.444,86.244 ccw(c107.553,85.354) 107.553,86.613 ccw(c107.553,87.872) AT89S52.39@108.444,86.982 ; AT89S52.39@108.962,86.613 104.014,86.613 103.251,87.376 103.251,108.375 106.636,111.76 109.728,111.76 112.776,114.808 1602.7@113.03,114.808 ; 111.533,113.565 cw(c113.03,112.068) 1602.7@113.03,114.185 ; 111.966,113.998 cw(c113.03,112.935) 1602.7@113.03,114.439 ; 112.146,114.178 ccw(c111.516,114.808) 1602.7@112.407,114.808
P00: 
P01: 1602.8 12864.8 AT89S52.38 R22.1 | length 86.6
  Top Layer w0.254: AT89S52.38@108.962,84.073 116.839,84.073 117.094,84.328 R22.1@125.73,84.328 ; AT89S52.38@109.481,83.704 cw(c110.371,82.814) 110.371,84.073 cw(c110.371,85.332) AT89S52.38@109.481,84.442 ; AT89S52.38@109.66,83.525 cw(c110.984,82.201) 110.984,84.073 cw(c110.984,85.945) AT89S52.38@109.66,84.621 ; 1602.8@110.049,115.249 ccw(c108.986,116.312) 110.49,116.312 ccw(c111.994,116.312) 1602.8@110.931,115.249 ; 12864.8@110.049,117.923 cw(c108.986,116.86) 110.49,116.86 cw(c111.994,116.86) 12864.8@110.931,117.923 ; 1602.8@110.229,115.069 ccw(c109.599,115.699) 110.49,115.699 ccw(c111.381,115.699) 1602.8@110.751,115.069 ; 12864.8@110.229,118.103 cw(c109.599,117.473) 110.49,117.473 cw(c111.381,117.473) 12864.8@110.751,118.103 ; 1602.8@110.49,114.808 12864.8@110.49,118.364 ; R22.1@125.281,83.879 ccw(c124.197,82.795) 124.197,84.328 ccw(c124.197,85.861) R22.1@125.281,84.777 ; R22.1@125.461,84.059 ccw(c124.81,83.408) 124.81,84.328 ccw(c124.81,85.248) R22.1@125.461,84.597
  Bottom Layer w0.254: AT89S52.38@108.264,83.525 ccw(c106.94,82.201) 106.94,84.073 ccw(c106.94,85.945) AT89S52.38@108.264,84.621 ; AT89S52.38@108.444,83.704 ccw(c107.553,82.814) 107.553,84.073 ccw(c107.553,85.332) AT89S52.38@108.444,84.442 ; AT89S52.38@108.962,84.073 102.998,84.073 102.362,84.709 102.362,108.204 106.426,112.268 107.95,112.268 1602.8@110.49,114.808 ; 1602.8@109.867,114.808 cw(c108.363,114.808) 109.426,113.744 cw(c110.49,112.681) 1602.8@110.49,114.185 ; 1602.8@110.121,114.808 cw(c109.23,114.808) 109.86,114.178 cw(c110.49,113.548) 1602.8@110.49,114.439
P02: 1602.9 12864.9 AT89S52.37 R23.1 | length 94.6
  Top Layer w0.254: 1602.9@107.509,115.249 ccw(c106.446,116.312) 107.95,116.312 ccw(c109.454,116.312) 1602.9@108.391,115.249 ; 12864.9@107.509,117.923 cw(c106.446,116.86) 107.95,116.86 cw(c109.454,116.86) 12864.9@108.391,117.923 ; 1602.9@107.689,115.069 ccw(c107.059,115.699) 107.95,115.699 ccw(c108.841,115.699) 1602.9@108.211,115.069 ; 12864.9@107.689,118.103 cw(c107.059,117.473) 107.95,117.473 cw(c108.841,117.473) 12864.9@108.211,118.103 ; 1602.9@107.95,114.808 12864.9@107.95,118.364 ; AT89S52.37@108.962,81.533 116.839,81.533 117.094,81.788 R23.1@125.73,81.788 ; AT89S52.37@109.481,81.164 cw(c110.371,80.274) 110.371,81.533 cw(c110.371,82.792) AT89S52.37@109.481,81.902 ; AT89S52.37@109.66,80.985 cw(c110.984,79.661) 110.984,81.533 cw(c110.984,83.405) AT89S52.37@109.66,82.081 ; R23.1@125.281,81.339 ccw(c124.197,80.255) 124.197,81.788 ccw(c124.197,83.321) R23.1@125.281,82.237 ; R23.1@125.349,81.788 R23.1@125.603,81.534 ; R23.1@125.461,81.519 ccw(c124.81,80.868) 124.81,81.788 ccw(c124.81,82.708) R23.1@125.461,82.057
  Bottom Layer w0.254: 107.315,113.411 ccw(c106.717,114.009) 1602.9@107.427,114.469 ; 107.537,113.633 ccw(c106.986,114.184) 1602.9@107.64,114.607 ; 107.759,113.855 ccw(c107.256,114.359) 1602.9@107.853,114.746 ; 1602.9@107.826,114.197 cw(c107.796,114.046) 107.95,114.046 ; 1602.9@107.95,114.808 107.95,114.046 ; 1602.9@108.074,114.197 ccw(c108.104,114.046) 107.95,114.046 ; AT89S52.37@108.264,80.985 ccw(c106.94,79.661) 106.94,81.533 ccw(c106.94,83.405) AT89S52.37@108.264,82.081 ; AT89S52.37@108.444,81.164 ccw(c107.553,80.274) 107.553,81.533 ccw(c107.553,82.792) AT89S52.37@108.444,81.902 ; AT89S52.37@108.962,81.533 99.188,81.533 98.552,82.169 98.552,107.696 103.886,113.03 106.934,113.03 107.95,114.046
P03: 1602.10 12864.10 AT89S52.36 JP-0.4 P0.4 R24.1 | length 115.4
  Top Layer w0.254: 1602.10@104.969,115.249 ccw(c103.906,116.312) 105.41,116.312 ccw(c106.914,116.312) 1602.10@105.851,115.249 ; 12864.10@104.969,117.923 cw(c103.906,116.86) 105.41,116.86 cw(c106.914,116.86) 12864.10@105.851,117.923 ; 1602.10@105.149,115.069 ccw(c104.519,115.699) 105.41,115.699 ccw(c106.301,115.699) 1602.10@105.671,115.069 ; 12864.10@105.149,118.103 cw(c104.519,117.473) 105.41,117.473 cw(c106.301,117.473) 12864.10@105.671,118.103 ; 1602.10@105.41,114.808 12864.10@105.41,118.364 ; AT89S52.36@108.962,78.993 116.839,78.993 P0.4@117.094,79.248 R24.1@125.73,79.248 ; AT89S52.36@109.481,78.624 cw(c110.371,77.734) 110.371,78.993 cw(c110.371,80.252) AT89S52.36@109.481,79.362 ; AT89S52.36@109.66,78.445 cw(c110.984,77.121) 110.984,78.993 cw(c110.984,80.865) AT89S52.36@109.66,79.541 ; 114.974,78.993 ccw(c114.974,81.368) P0.4@116.653,79.689 ; 115.587,78.993 ccw(c115.587,80.755) P0.4@116.833,79.509 ; 116.201,78.993 ccw(c116.201,80.141) P0.4@117.013,79.329 ; 116.206,78.993 cw(c116.206,78.36) P0.4@116.653,78.807 ; P0.4@117.355,78.987 cw(c117.985,78.357) 117.985,79.248 cw(c117.985,80.139) P0.4@117.355,79.509 ; P0.4@117.535,78.807 cw(c118.598,77.744) 118.598,79.248 cw(c118.598,80.752) P0.4@117.535,79.689 ; JP-0.4@120.717,78.807 ccw(c119.654,77.744) 119.654,79.248 ccw(c119.654,80.752) JP-0.4@120.717,79.689 ; JP-0.4@120.897,78.987 ccw(c120.267,78.357) 120.267,79.248 ccw(c120.267,80.139) JP-0.4@120.897,79.509 ; JP-0.4@121.419,78.987 cw(c122.049,78.357) 122.049,79.248 cw(c122.049,80.139) JP-0.4@121.419,79.509 ; JP-0.4@121.599,78.807 cw(c122.662,77.744) 122.662,79.248 cw(c122.662,80.752) JP-0.4@121.599,79.689 ; R24.1@125.281,78.799 ccw(c124.197,77.715) 124.197,79.248 ccw(c124.197,80.781) R24.1@125.281,79.697 ; R24.1@125.349,79.248 R24.1@125.603,78.994 ; R24.1@125.461,78.979 ccw(c124.81,78.328) 124.81,79.248 ccw(c124.81,80.168) R24.1@125.461,79.517
  Bottom Layer w0.254: 103.046,113.206 cw(c105.41,110.841) 1602.10@105.41,114.185 ; 103.479,113.639 cw(c105.41,111.709) 1602.10@105.41,114.439 ; 103.913,114.073 cw(c105.41,112.576) 1602.10@105.41,114.693 ; 104.346,114.506 cw(c105.41,113.443) 1602.10@105.41,114.947 ; 1602.10@104.799,114.684 ccw(c104.648,114.654) 104.648,114.808 ; 1602.10@104.799,114.932 cw(c104.648,114.962) 104.648,114.808 ; 1602.10@105.41,114.808 104.648,114.808 ; AT89S52.36@108.264,78.445 ccw(c106.94,77.121) 106.94,78.993 ccw(c106.94,80.865) AT89S52.36@108.264,79.541 ; AT89S52.36@108.444,78.624 ccw(c107.553,77.734) 107.553,78.993 ccw(c107.553,80.252) AT89S52.36@108.444,79.362 ; AT89S52.36@108.962,78.993 99.569,78.993 97.917,80.645 97.917,108.077 104.648,114.808
P03: 
P04: 1602.11 12864.11 AT89S52.35 R25.1 | length 98
  Top Layer w0.254: 1602.11@102.429,115.249 ccw(c101.366,116.312) 102.87,116.312 ccw(c104.374,116.312) 1602.11@103.311,115.249 ; 12864.11@102.429,117.923 cw(c101.366,116.86) 102.87,116.86 cw(c104.374,116.86) 12864.11@103.311,117.923 ; 1602.11@102.609,115.069 ccw(c101.979,115.699) 102.87,115.699 ccw(c103.761,115.699) 1602.11@103.131,115.069 ; 12864.11@102.609,118.103 cw(c101.979,117.473) 102.87,117.473 cw(c103.761,117.473) 12864.11@103.131,118.103 ; 1602.11@102.87,114.808 12864.11@102.87,118.364 ; AT89S52.35@108.962,76.453 116.839,76.453 117.094,76.708 R25.1@125.73,76.708 ; AT89S52.35@109.481,76.084 cw(c110.371,75.194) 110.371,76.453 cw(c110.371,77.712) AT89S52.35@109.481,76.822 ; AT89S52.35@109.66,75.905 cw(c110.984,74.581) 110.984,76.453 cw(c110.984,78.325) AT89S52.35@109.66,77.001 ; R25.1@125.281,76.259 ccw(c124.197,75.175) 124.197,76.708 ccw(c124.197,78.241) R25.1@125.281,77.157 ; R25.1@125.349,76.708 R25.1@125.603,76.454 ; R25.1@125.461,76.439 ccw(c124.81,75.788) 124.81,76.708 ccw(c124.81,77.628) R25.1@125.461,76.977
  Bottom Layer w0.254: 101.537,113.094 ccw(c99.823,114.808) 1602.11@102.247,114.808 ; 101.971,113.528 ccw(c100.69,114.808) 1602.11@102.501,114.808 ; 102.404,113.961 ccw(c101.558,114.808) 1602.11@102.755,114.808 ; 102.457,114.014 cw(c102.87,113.601) 1602.11@102.87,114.185 ; 1602.11@102.87,114.808 102.87,114.427 99.822,111.379 99.695,111.379 97.282,108.966 97.282,78.486 99.315,76.453 AT89S52.35@108.962,76.453 ; AT89S52.35@108.264,75.905 ccw(c106.94,74.581) 106.94,76.453 ccw(c106.94,78.325) AT89S52.35@108.264,77.001 ; AT89S52.35@108.444,76.084 ccw(c107.553,75.194) 107.553,76.453 ccw(c107.553,77.712) AT89S52.35@108.444,76.822
P05: 1602.12 12864.12 AT89S52.34 JP-0.6 P0.6 R26.1 | length 168.3
  Top Layer w0.254: 1602.12@99.889,115.249 ccw(c98.826,116.312) 100.33,116.312 ccw(c101.834,116.312) 1602.12@100.771,115.249 ; 12864.12@99.889,117.923 cw(c98.826,116.86) 100.33,116.86 cw(c101.834,116.86) 12864.12@100.771,117.923 ; 1602.12@100.069,115.069 ccw(c99.439,115.699) 100.33,115.699 ccw(c101.221,115.699) 1602.12@100.591,115.069 ; 12864.12@100.069,118.103 cw(c99.439,117.473) 100.33,117.473 cw(c101.221,117.473) 12864.12@100.591,118.103 ; 1602.12@100.117,114.222 cw(c100.007,113.919) 100.33,113.919 ; 12864.12@100.33,118.364 100.33,113.919 ; 1602.12@100.543,114.222 ccw(c100.653,113.919) 100.33,113.919 ; AT89S52.34@108.264,73.365 ccw(c106.94,72.041) 106.94,73.913 ccw(c106.94,75.785) AT89S52.34@108.264,74.461 ; AT89S52.34@108.444,73.544 ccw(c107.553,72.654) 107.553,73.913 ccw(c107.553,75.172) AT89S52.34@108.444,74.282 ; AT89S52.34@109.481,73.544 cw(c110.371,72.654) 110.371,73.913 cw(c110.371,75.172) AT89S52.34@109.481,74.282 ; AT89S52.34@109.66,73.365 cw(c110.984,72.041) 110.984,73.913 cw(c110.984,75.785) AT89S52.34@109.66,74.461 ; 114.974,73.913 ccw(c114.974,76.288) P0.6@116.653,74.609 ; 115.587,73.913 ccw(c115.587,75.675) P0.6@116.833,74.429 ; 116.201,73.913 ccw(c116.201,75.061) P0.6@117.013,74.249 ; 116.206,73.913 cw(c116.206,73.28) P0.6@116.653,73.727 ; P0.6@117.355,73.907 cw(c117.985,73.277) 117.985,74.168 cw(c117.985,75.059) P0.6@117.355,74.429 ; P0.6@117.535,73.727 cw(c118.598,72.664) 118.598,74.168 cw(c118.598,75.672) P0.6@117.535,74.609 ; JP-0.6@120.717,73.727 ccw(c119.654,72.664) 119.654,74.168 ccw(c119.654,75.672) JP-0.6@120.717,74.609 ; JP-0.6@120.897,73.907 ccw(c120.267,73.277) 120.267,74.168 ccw(c120.267,75.059) JP-0.6@120.897,74.429 ; JP-0.6@121.419,73.907 cw(c122.049,73.277) 122.049,74.168 cw(c122.049,75.059) JP-0.6@121.419,74.429 ; JP-0.6@121.599,73.727 cw(c122.662,72.664) 122.662,74.168 cw(c122.662,75.672) JP-0.6@121.599,74.609 ; R26.1@125.281,73.719 ccw(c124.197,72.635) 124.197,74.168 ccw(c124.197,75.701) R26.1@125.281,74.617 ; R26.1@125.461,73.899 ccw(c124.81,73.248) 124.81,74.168 ccw(c124.81,75.088) R26.1@125.461,74.437 ; R26.1@125.73,74.168 P0.6@117.094,74.168 116.839,73.913 102.744,73.913 102.235,74.422 102.235,89.281 98.171,93.345 69.088,93.345 68.834,93.599 68.834,97.282 67.941,98.175 67.941,98.208 67.945,98.212 67.945,112.141 98.552,112.141 100.33,113.919
P05: 
P06: 1602.13 12864.13 AT89S52.33 R27.1 | length 156.5
  Top Layer w0.254: 96.637,113.528 ccw(c95.356,114.808) 1602.13@97.167,114.808 ; 96.943,113.834 cw(c97.79,112.988) 1602.13@97.79,114.185 ; 97.07,113.961 ccw(c96.224,114.808) 1602.13@97.421,114.808 ; 1602.13@97.349,115.249 ccw(c96.286,116.312) 97.79,116.312 ccw(c99.294,116.312) 1602.13@98.231,115.249 ; 12864.13@97.349,117.923 cw(c96.286,116.86) 97.79,116.86 cw(c99.294,116.86) 12864.13@98.231,117.923 ; 1602.13@97.529,115.069 ccw(c96.899,115.699) 97.79,115.699 ccw(c98.681,115.699) 1602.13@98.051,115.069 ; 12864.13@97.529,118.103 cw(c96.899,117.473) 97.79,117.473 cw(c98.681,117.473) 12864.13@98.051,118.103 ; 12864.13@97.79,118.364 97.79,114.681 96.012,112.903 67.774,112.903 67.264,112.393 67.264,98.046 68.326,96.984 68.326,92.456 68.58,92.202 98.171,92.202 101.473,88.9 101.473,71.501 101.601,71.373 116.839,71.373 117.094,71.628 R27.1@125.73,71.628 ; AT89S52.33@108.264,70.825 ccw(c106.94,69.501) 106.94,71.373 ccw(c106.94,73.245) AT89S52.33@108.264,71.921 ; AT89S52.33@108.444,71.004 ccw(c107.553,70.114) 107.553,71.373 ccw(c107.553,72.632) AT89S52.33@108.444,71.742 ; AT89S52.33@109.481,71.004 cw(c110.371,70.114) 110.371,71.373 cw(c110.371,72.632) AT89S52.33@109.481,71.742 ; AT89S52.33@109.66,70.825 cw(c110.984,69.501) 110.984,71.373 cw(c110.984,73.245) AT89S52.33@109.66,71.921 ; R27.1@125.281,71.179 ccw(c124.197,70.095) 124.197,71.628 ccw(c124.197,73.161) R27.1@125.281,72.077 ; R27.1@125.461,71.359 ccw(c124.81,70.708) 124.81,71.628 ccw(c124.81,72.548) R27.1@125.461,71.897
P07: 1602.14 12864.14 AT89S52.32 R28.1 | length 156.7
  Top Layer w0.254: 94.552,113.729 ccw(c94.05,114.23) 1602.14@94.689,114.537 ; 94.805,113.982 ccw(c94.392,114.394) 1602.14@94.918,114.648 ; 1602.14@94.809,115.249 ccw(c93.746,116.312) 95.25,116.312 ccw(c96.754,116.312) 1602.14@95.691,115.249 ; 12864.14@94.809,117.923 cw(c93.746,116.86) 95.25,116.86 cw(c96.754,116.86) 12864.14@95.691,117.923 ; 94.837,114.014 cw(c95.25,113.601) 1602.14@95.25,114.185 ; 1602.14@94.989,115.069 ccw(c94.359,115.699) 95.25,115.699 ccw(c96.141,115.699) 1602.14@95.511,115.069 ; 12864.14@94.989,118.103 cw(c94.359,117.473) 95.25,117.473 cw(c96.141,117.473) 12864.14@95.511,118.103 ; 12864.14@95.25,118.364 95.25,114.427 94.361,113.538 67.691,113.538 66.573,112.42 66.573,98.054 66.556,98.036 67.691,96.901 67.691,91.948 67.945,91.694 97.79,91.694 100.838,88.646 100.838,69.342 101.347,68.833 116.839,68.833 117.094,69.088 R28.1@125.73,69.088 ; AT89S52.32@108.264,68.285 ccw(c106.94,66.961) 106.94,68.833 ccw(c106.94,70.705) AT89S52.32@108.264,69.381 ; AT89S52.32@108.444,68.464 ccw(c107.553,67.574) 107.553,68.833 ccw(c107.553,70.092) AT89S52.32@108.444,69.202 ; AT89S52.32@109.481,68.464 cw(c110.371,67.574) 110.371,68.833 cw(c110.371,70.092) AT89S52.32@109.481,69.202 ; AT89S52.32@109.66,68.285 cw(c110.984,66.961) 110.984,68.833 cw(c110.984,70.705) AT89S52.32@109.66,69.381 ; R28.1@125.281,68.639 ccw(c124.197,67.555) 124.197,69.088 ccw(c124.197,70.621) R28.1@125.281,69.537 ; R28.1@125.461,68.819 ccw(c124.81,68.168) 124.81,69.088 ccw(c124.81,70.008) R28.1@125.461,69.357